# Altium PCB main.PcbDoc
Units mm, origin at the board's own origin, x right, y up, seen from the top; angles counter-clockwise.
Board outline 46.99 x 80.01 mm, 2 copper layers (Top Layer, Bottom Layer); 25 components, 19 nets, 90 pads, 7 vias.
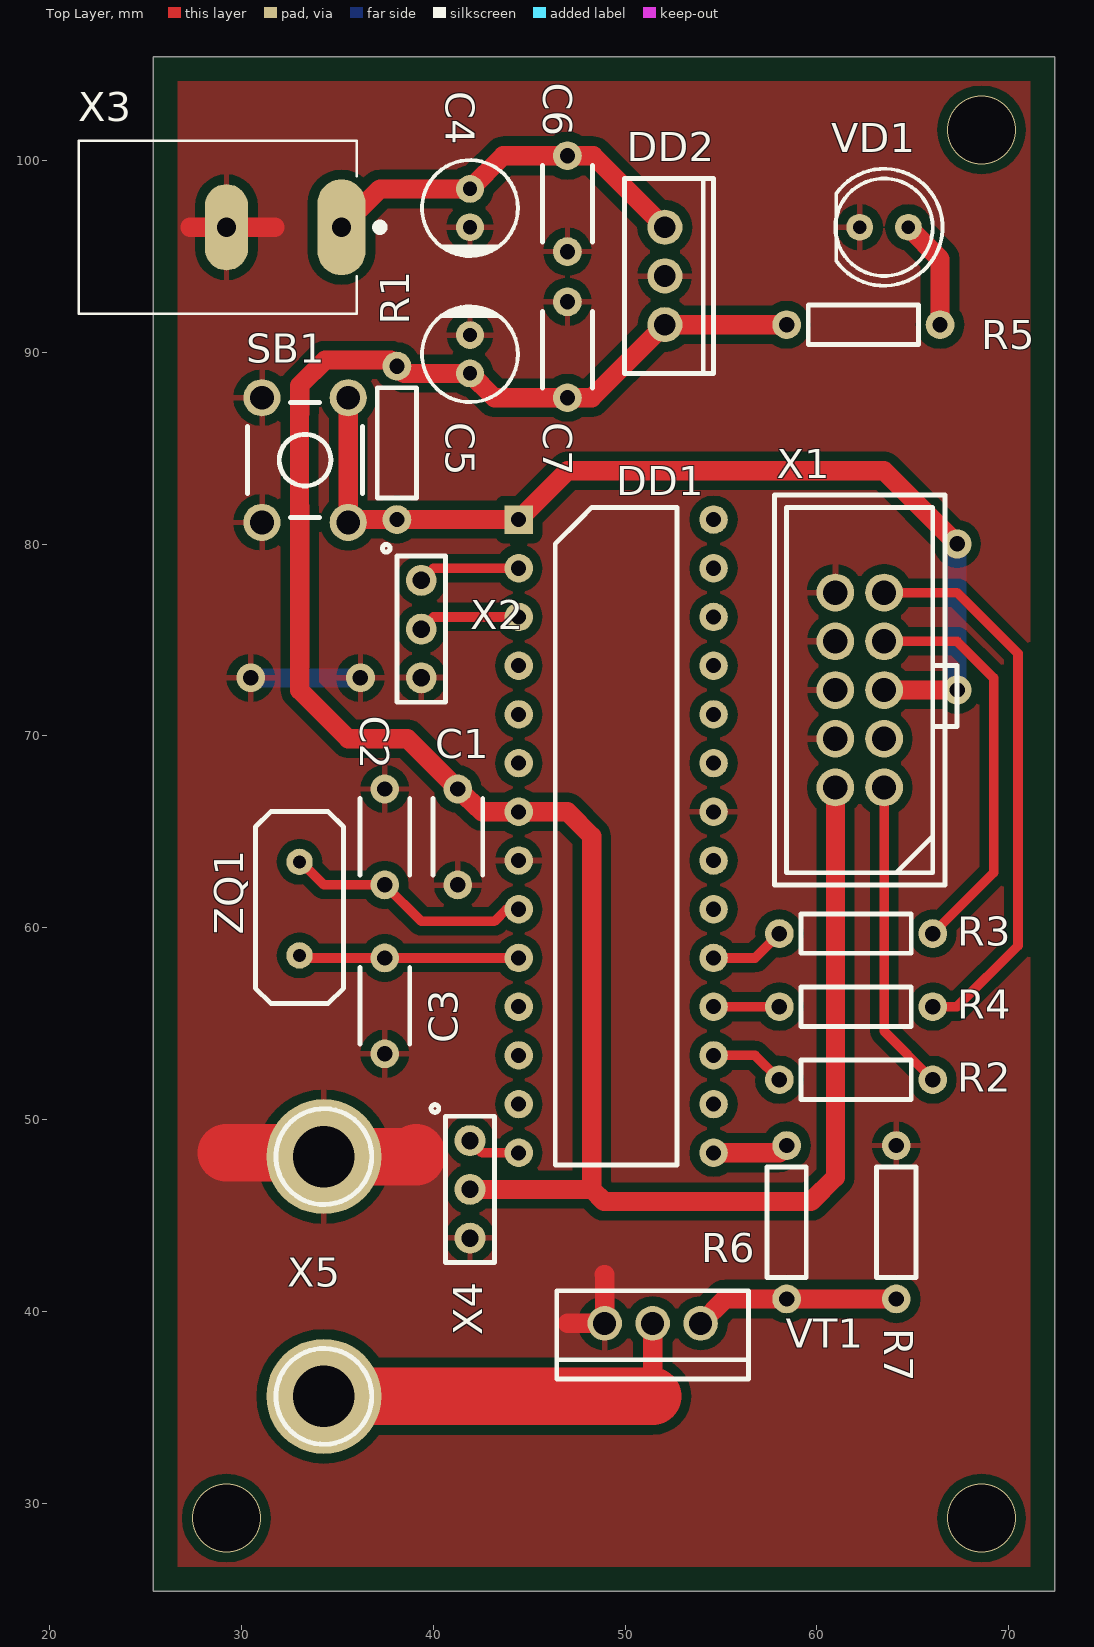
[diagram p0: Top Layer view]
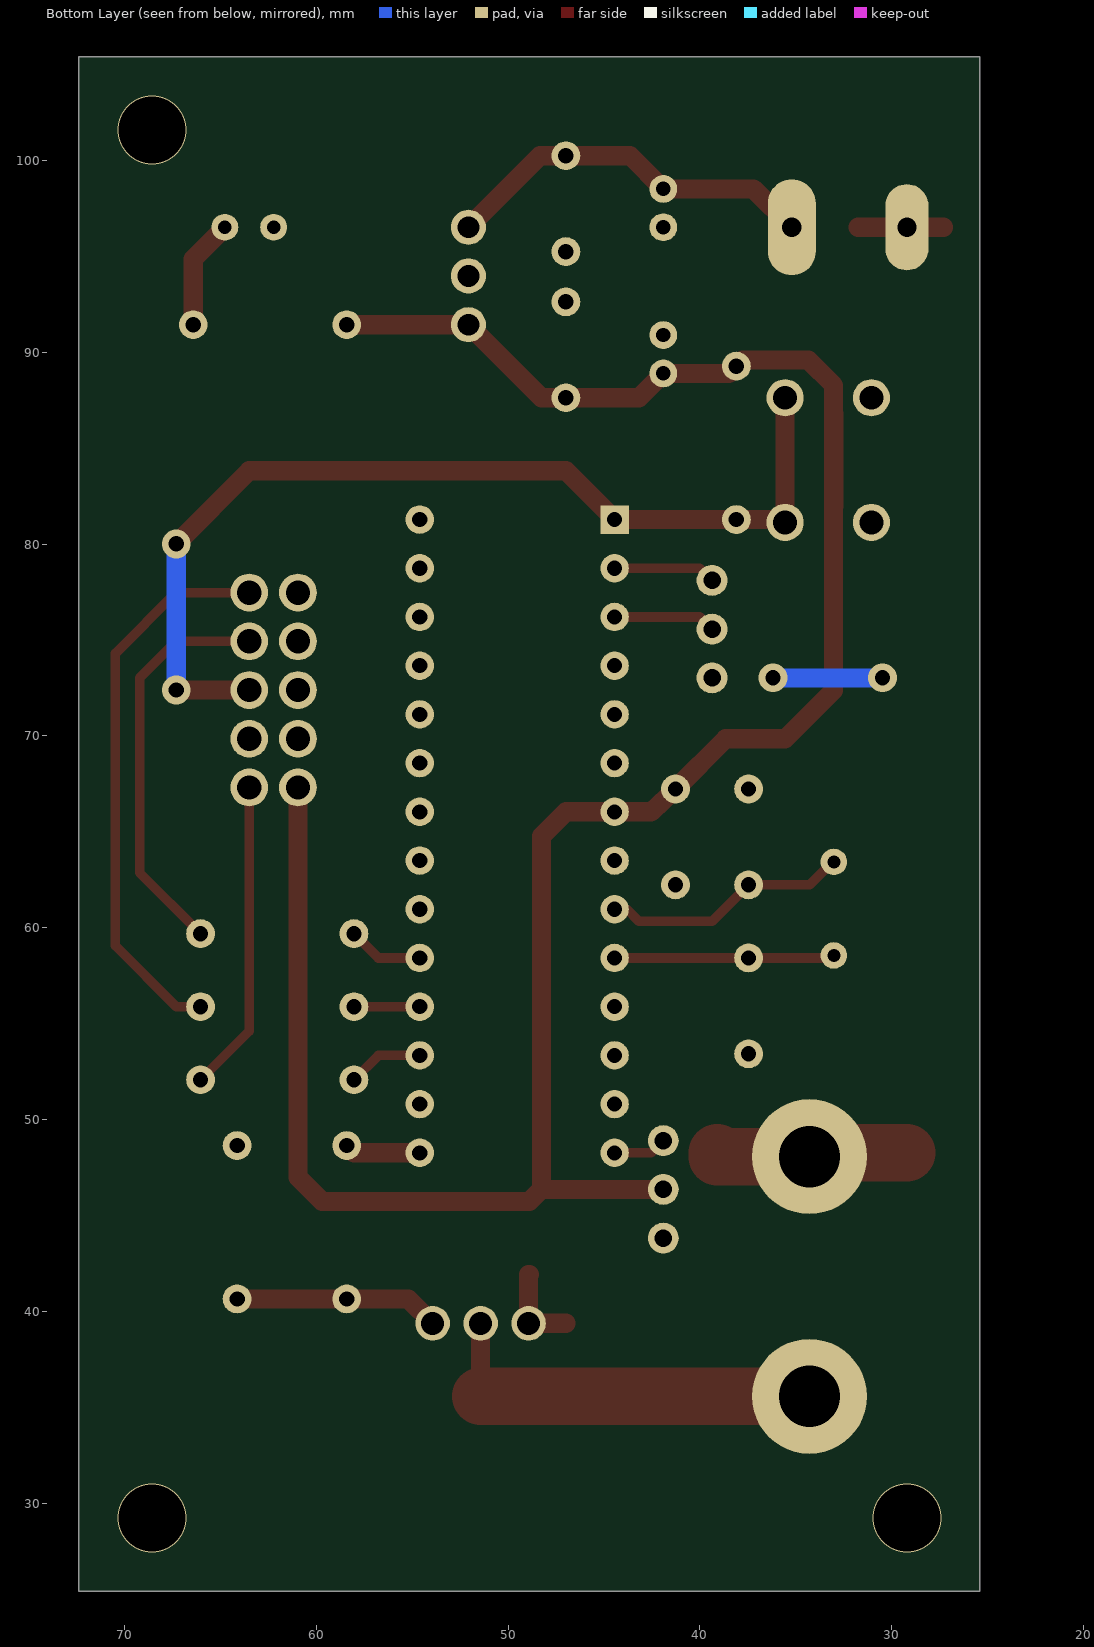
[diagram p1: Bottom Layer view, seen from below]

## Layer stack, top to bottom
Top Solder: solder mask 0.0102, Solder Resist, Dk 3.5
Top Layer: signal copper 0.0356
Dielectric 1: dielectric 0.32, FR-4, Dk 4.8
Bottom Layer: signal copper 0.0356
Bottom Solder: solder mask 0.0102, Solder Resist, Dk 3.5

## Board outline
25.4,25.4 25.4,105.41 72.39,105.41 72.39,25.4

## Design rules (kind name [scope] priority, off if disabled: settings)
Clearance [All] p1: gap=0.5 ignorepadtopadclearanceinfootprint=FALSE
PolygonConnect [All] p1: connectstyle=Relief reliefconductorwidth=0.3 reliefentries=4 polygonreliefangle="90 Angle" airgapwidth=0.5
RoutingVias [All] p1: holewidth=0.8 width=1.5 viastyle="Through Hole" minholewidth=0.8 minwidth=1.5 maxholewidth=0.8 maxwidth=1.5
SolderMaskExpansion [All] p1: expansion=0.102
Width [All] p1: maxlimit=3 minlimit=0.254 preferedwidth=0.254
30 further rules are at their usual default settings.

## Components (designator, comment, footprint, x,y, rotation, side; value= is the part's Value field where it differs from the comment)
C1 "100P50V_CAPRR" CAPRR500W50L400T260H400 41.275,62.23 r90 top
C2 "30P50V_CAPRR" CAPRR500W50L400T260H400 37.465,67.23 r270 top
C3 "30P50V_CAPRR" CAPRR500W50L400T260H400 37.465,53.42 r90 top
C4 "100U16V_CAPAE" CAPAE500X1100 41.91,98.52 r270 top
C5 "47U16V_CAPAE" CAPAE500X1100 41.91,88.9 r90 top
C6 "100P50V_CAPRR" CAPRR500W50L400T260H400 46.99,95.25 r90 top
C7 "100P50V_CAPRR" CAPRR500W50L400T260H400 46.99,92.63 r270 top
DD1 "ATMEGA8" PDIP28 44.45,81.28 r0 top
DD2 "L7805ABV" TO-220 52.07,96.52 r270 top
R1 "CF14JT10K0" RESAD800W55L600D230 38.1,81.28 r90 top
R2 "CF14JT220R0" RESAD800W55L600D230 58.04,52.07 r0 top
R3 "CF14JT220R0" RESAD800W55L600D230 58.04,59.69 r0 top
R4 "CF14JT220R0" RESAD800W55L600D230 58.04,55.88 r0 top
R5 "CF14JT220R0" RESAD800W55L600D230 66.42,91.44 r180 top
R6 "CF14JT100R" RESAD800W55L600D230 58.42,48.64 r270 top
R7 "CF14JT10K0" RESAD800W55L600D230 64.135,40.64 r90 top
SB1 "BTN_TACTILE_6X6" BTN_TACTILE_6X6 31.06,81.13 r90 top
VD1 "LED_SSL-LX5093GD-TR26" LED500 64.77,96.52 r180 top
VT1 "IRF730" TO-220-1 53.935,39.37 r180 top
X1 "ISP" 302_SERIES_10POS 63.5,67.31 r180 top
X2 "61300311121" PLS_3 39.37,78.105 r0 top
X3 "PJ-037BH" PJ-037BH 35.21,96.52 r180 top
X4 "61300311121" PLS_3 41.91,48.895 r0 top
X5 "SCREW3N2" SCREW3N2 34.29,35.56 r180 top
ZQ1 "16MHZ_XTAL" XTAL1050X465X350 33.02,58.55 r90 top

## Footprints (in the part's own frame and the unit in brackets; to place one, negate y for a bottom-side part, rotate by r counter-clockwise, add the part's x,y. Pads: shape width x height; smd on the part's side, far side on the other; paste and mask are expansions set on the pad)
302_SERIES_10POS [mm] "2.54MM DUAL ROW VERTICAL BOX HEADER"
  round 1.97 hole 1.27: 1(0,0) 2(2.54,0) 3(0,-2.54) 4(2.54,-2.54) 5(0,-5.08) 6(2.54,-5.08) 7(0,-7.62) 8(2.54,-7.62) 9(0,-10.16) 10(2.54,-10.16)
  silkscreen extent -3.81,-15.24 5.72,5.08
BTN_TACTILE_6X6 [mm] "SWITCH TACTILE SPST-NO 0.05A 24V"
  round 1.94 hole 1.24: 1(0,0) 2(6.5,0) 3(0,-4.5) 4(6.5,-4.5)
  silkscreen extent 0.25,-5.25 6.25,0.75, body extent 0.25,-5.25 6.25,0.75, height 8
CAPAE500X1100 [mm]
  round 1.45 hole 0.75: 1(0,0) 2(2,0)
  silkscreen extent -1.5,-2.5 3.5,2.5, body extent -1.5,-2.5 3.5,2.5, height 11
CAPRR500W50L400T260H400 [mm]
  round 1.5 hole 0.8: 1(0,0) 2(5,0)
  silkscreen extent 0.5,-1.3 4.5,1.3, body extent 0.5,-1.3 4.5,1.3, height 5
LED500 [mm]
  round 1.4 hole 0.7: A(0,0) K(2.54,0)
  silkscreen extent -1.77,-3.05 3.81,3.05, body extent -1.73,-3 4.27,3, height 8.6
PDIP28 [mm] "Plastic Dual  Inline Package 28-lead"
  rect 1.483x1.483 hole 0.783: 1(0,0)
  round 1.483 hole 0.783: 2(0,-2.54) 3(0,-5.08) 4(0,-7.62) 5(0,-10.16) 6(0,-12.7) 7(0,-15.24) 8(0,-17.78) 9(0,-20.32) 10(0,-22.86) 11(0,-25.4) 12(0,-27.94) 13(0,-30.48) 14(0,-33.02) 15(10.16,-33.02) 16(10.16,-30.48) 17(10.16,-27.94) 18(10.16,-25.4) 19(10.16,-22.86) 20(10.16,-20.32) 21(10.16,-17.78) 22(10.16,-15.24) 23(10.16,-12.7) 24(10.16,-10.16) 25(10.16,-7.62) 26(10.16,-5.08) 27(10.16,-2.54) 28(10.16,0)
  silkscreen extent 1.91,-33.66 8.25,0.64, body extent 1.27,-33.66 8.89,0.64, height 4.57
PJ-037BH [mm]
  oval 2.5x5 hole 1: 1(0,0)
  oval 2.25x4.5 hole 1: 2(6,0)
  silkscreen extent -2.2,-4.5 13.7,4.5, body extent -0.8,-4.5 13.7,4.5, height 11
PLS_3 [mm]
  round 1.61 hole 0.91: 1(0,0) 2(0,-2.54) 3(0,-5.08)
  silkscreen extent -2.03,-6.35 1.27,1.88
RESAD800W55L600D230 [mm]
  round 1.5 hole 0.8: 1(0,0) 2(8,0)
  silkscreen extent 1.12,-1.02 6.88,1.02, body extent 1,-1.15 7,1.15, height 1.14
SCREW3N2 [mm]
  round 6 hole 3.2: 1(0,0) 2(0,-12.5)
  silkscreen extent -2.5,-15 2.5,2.5, body extent -2.5,-15 2.5,2.5, height 1.5
TO-220 [mm]
  round 1.83 hole 1.13: 1(0,0) 2(2.54,0) 3(5.08,0)
  silkscreen extent -2.54,-2.1 7.62,2.54, body extent -2.54,-2.03 7.62,2.54, height 15.5
TO-220-1 [mm]
  round 1.8 hole 1.2: 1(0,0) 2(2.5,0) 3(5,0)
  silkscreen extent -2.5,-1.7 7.5,2.9, body extent -2.5,-1.7 7.5,2.9, height 19
XTAL1050X465X350 [mm]
  round 1.38 hole 0.68: 1(0,0) 2(4.88,0)
  silkscreen extent -2.5,-2.3 7.5,2.3, body extent -2.5,-2.3 7.5,2.3, height 3.5

## Part data
C1 C6 C7: "CAP CER 100PF 50V C0G/NP0 RADIAL", Capacitance=100pF, Manufacturer="Vishay BCcomponents", Manufacturer Part Number=K101J10C0GF5UH5, Voltage=50VDC
C2 C3: "CAP CER 30PF 50V C0G/NP0 RADIAL", Capacitance=100pF, Manufacturer="Vishay BCcomponents", Manufacturer Part Number=K300J10C0GF5UH5, Voltage=50VDC
C4: "CAP ALUM 100UF 20% 16V RADIAL", Capacitance=47µF, Manufacturer=Panasonic, Manufacturer Part Number=ECA1CHG101, Category=Capacitors
C5: "CAP ALUM 47UF 20% 16V RADIAL", Capacitance=47µF, Manufacturer=Panasonic, Manufacturer Part Number=ECA1CHG470, Category=Capacitors
DD1: "LORA RADIO 868MHZ", Manufacturer="Microchip / Atmel", Manufacturer Part Number=ATMEGA8-16PU
DD2: library part L7805, "IC REG LINEAR 5V 1.5A TO220AB", Manufacturer=STMicroelectronics, Manufacturer Part Number=L7805ABV
R1: library part 4.7K_AD800W55L600D230, "RES 10K OHM 1/4W 5% AXIAL", Manufacturer="Stackpole Electronics", Power (Watts)="0.25W, 1/4W", Resistance (Ohms)=10k, Category=Resistors, Manufacturer Part Number=CF14JT10K0
R2 R3 R4 R5: library part 220R_AD800W55L600D230, "RES 220 OHM 1/4W 5% AXIAL", Manufacturer="Stackpole Electronics", Power (Watts)="0.25W, 1/4W", Resistance (Ohms)=220, Category=Resistors, Manufacturer Part Number=CF14JT220R0
R6: library part 100R_AD800W55L600D230, "RES 100 OHM 1/4W 5% AXIAL", Manufacturer="Stackpole Electronics", Power (Watts)="0.25W, 1/4W", Resistance (Ohms)=100, Category=Resistors, Manufacturer Part Number=CF14JT100R
R7: library part 10K_AD800W55L600D230, "RES 10K OHM 1/4W 5% AXIAL", Manufacturer="Stackpole Electronics", Power (Watts)="0.25W, 1/4W", Resistance (Ohms)=10k, Category=Resistors, Manufacturer Part Number=CF14JT10K0
SB1: "SWITCH TACTILE SPST-NO 0.05A 24V", Manufacturer="TE Connectivity Alcoswitch", Manufacturer Part Number=1825910-6, Pole Throw Configuration=SPST
VD1: "LED GREEN DIFFUSED T-1 3/4 T/H", Manufacturer=Lumex, Manufacturer Part Number=SSL-LX5093GD-TR26
VT1: "MOSFET N-CH 400V 5.5A TO-220", Manufacturer=STMicroelectronics, Manufacturer Part Number=IRF730
X1: "CONN HEADER VERT 10POS 2.54MM", Manufacturer="On-Shore Technology", Manufacturer Part Number=302-S101, Category="Connectors, Interconnects", ManufacturerPartNumber=302-S101, Number of Positions=10, Number of Rows=2, Pitch="0.100\" (2.54mm)"
X2 X4: library part PLS_3, "CONN HEADER VERT 8POS 2.54MM", Manufacturer="Wurth Electronics", Category="Connectors, Interconnects", Manufacturer Part Number=61300311121, Number of Contacts=3, Number of Positions=3, Number of Rows=1, Pitch="0.100\" (2.54mm)"
X3: "CONN PWR JACK 2.5X5.5MM SOLDER", Manufacturer=CUI, Manufacturer Part Number=PJ-037BH, Product Category="DC Power Connectors"
ZQ1: "CRYSTAL 16.0000MHZ 20PF T/H", Frequency="16 MHz", Load Capacitance="20 pF", Manufacturer="ECS International", Manufacturer Part Number=ECS-160-20-4X, Category=Crystals

## Via types
v1: diameter 1.5, hole 0.8, Top Layer to Bottom Layer, 4 vias
v2: diameter 3.6, hole 3.5, Top Layer to Bottom Layer, 3 vias

## Nets (pads, with @x,y where several pads share a name; then routed paths per layer and width w, separated by ;. In a path a pad name is that pad's centre, name@x,y a point inside that pad or via, vN(x,y) a via of type N, cw(c..) or ccw(c..) an arc to the next point about the centre after c; other vN are vias at no path point)
+5V: C1.2 C5.1 C7.2 DD1.7 DD2.3 R1.2 R5.2 X1.2 X4.2 | length 121.2
  Top Layer w1: X4.2 48.26,46.355 ; R5.2 DD2.3 48.26,87.63 C7.2 43.18,87.63 C5.1 38.48,88.9 R1.2 37.78,89.6 34.355,89.6 33.03,88.275 33.03,86.814 33.02,86.804 33.02,81.956 33.03,81.946 33.03,72.38 35.56,69.85 38.655,69.85 C1.2 42.545,66.04 DD1.7 46.99,66.04 48.26,64.77 48.26,46.355 ; X1.2 60.96,46.99 59.69,45.72 48.895,45.72 48.26,46.355
DHTXX: DD1.14 X4.1 | length 2.8
  Top Layer w0.5: X4.1 42.545,48.26 DD1.14
GND: C1.1 C2.1 C3.1 C4.2 C5.2 C6.1 C7.1 DD1.8 DD1.22 DD2.2 R7.2 SB1.1 SB1.2 VD1.K VT1.3 X1.4 X1.6 X1.8 X1.10 X2.3 X3.2 X4.3 X5.2 | length 25
  Top Layer w1: 27.305,96.52 X3.2 31.75,96.52 ; 46.99,39.37 VT1.3 48.935,41.91 48.895,41.91
  Top Layer w3: 29.21,48.26 34.29,48.26 X5.2 39.105,48.06 39.105,48.26
  Bottom Layer w1: v1(30.48,73.025) v1(36.195,73.025)
MISO: DD1.18 R4.1 | length 3.4
  Top Layer w0.5: DD1.18 R4.1
MOSI: DD1.17 R2.1 | length 4
  Top Layer w0.5: DD1.17 56.77,53.34 R2.1
NetC2_2: C2.2 DD1.9 ZQ1.2 | length 13
  Top Layer w0.5: ZQ1.2 33.09,63.43 34.29,62.23 C2.2 39.37,60.325 43.18,60.325 43.815,60.96 DD1.9
NetC3_2: C3.2 DD1.10 ZQ1.1 | length 11.4
  Top Layer w0.5: ZQ1.1@33.02,58.42 C3.2 DD1.10
NetC4_1: C4.1 C6.2 DD2.1 X3.1 | length 20
  Top Layer w1: X3.1 37.21,98.52 C4.1 43.64,100.25 C6.2 48.34,100.25 DD2.1
NetDD1_15: DD1.15 R6.1 | length 4
  Top Layer w1: DD1.15 58.04,48.26 R6.1
NetR2_2: R2.2 X1.1 | length 16.3
  Top Layer w0.5: X1.1 63.5,54.61 R2.2
NetR3_2: R3.2 X1.7 | length 21.2
  Top Layer w0.5: X1.7 67.31,74.93 69.215,73.025 69.215,62.865 R3.2
NetR4_2: R4.2 X1.9 | length 29.3
  Top Layer w0.5: X1.9 67.31,77.47 70.485,74.295 70.485,59.055 67.31,55.88 R4.2
NetR5_1: R5.1 VD1.A | length 5.8
  Top Layer w1: VD1.A 66.42,94.87 R5.1
NetR6_2: R6.2 R7.1 VT1.1 | length 10.7
  Top Layer w1: VT1.1 55.205,40.64 R6.2 R7.1
NetVT1_2: VT1.2 X5.1 | length 21
  Top Layer w1: 51.435,35.56 VT1.2
  Top Layer w3: X5.1 51.435,35.56
RESET: DD1.1 R1.1 SB1.3 SB1.4 X1.5 | length 52.3
  Top Layer w1: SB1.4@35.56,87.78 SB1.4 35.56,81.28 R1.1 DD1.1 46.99,83.82 63.5,83.82 v1(67.31,80.01) ; X1.5 v1(67.31,72.39)
  Bottom Layer w1: v1(67.31,72.39) v1(67.31,80.01)
RXD: DD1.2 X2.1 | length 5.3
  Top Layer w0.5: X2.1 40.005,78.74 DD1.2
SCK: DD1.19 R3.1 | length 4
  Top Layer w0.5: DD1.19 56.77,58.42 R3.1
TXD: DD1.3 X2.2 | length 5.3
  Top Layer w0.5: X2.2 40.005,76.2 DD1.3
pads on no net: DD1.4 DD1.5 DD1.6 DD1.11 DD1.12 DD1.13 DD1.16 DD1.20 DD1.21 DD1.23 DD1.24 DD1.25 DD1.26 DD1.27 DD1.28 X1.3
copper on no net:
  other v2: 29.21,29.21 68.58,29.21 68.58,101.6

## Polygon pours and split planes (outlines as drawn)
GND on Top Layer "Top Overlay-No Net" (solid, pour order 2): 26.67,26.67 26.67,104.14 71.12,104.14 71.12,26.67

## Silkscreen, mask and mechanical layers (free items; w line width, h text height)
Board:
  the board outline again, w0.2